# EAGLE board Led_Switch (EAGLE 4.16)
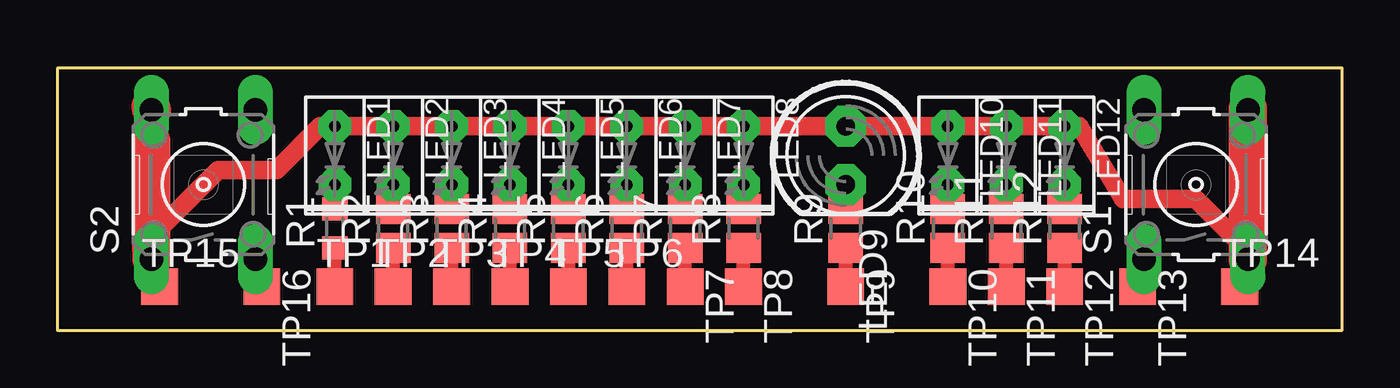
[diagram p0: board, top side]

Size 55.88 x 11.43 mm. Coordinates in mm from the lower left corner, seen from the top.
Outline: 0,0 55.88,0 55.88,11.43 0,11.43 0,0
Copper layers (1*2+15*16): Top 0.035mm / dielectric 0.2mm / Route2 0.035mm / dielectric 0.15mm / Route15 0.035mm / dielectric 0.2mm / Bottom 0.035mm
Design rules "default": minimum track width 10mil, minimum drill 24mil, track to track 8mil, track to pad 8mil, pad to pad 8mil, via to via 8mil, smd to smd 8mil, copper to edge 40mil, drill to drill 8mil, minimum pad ring 10mil, minimum via ring 8mil, stop-mask expansion 4mil, vias tented up to drill 0mil, thermal gap 10mil

## Footprints (pad centres in the part's own frame; a part is rotated, then mirrored left to right if it is on the bottom)
LED2X5 = drill 0.5 pad 1.422 octagon: A -1.27,0; K 1.27,0
LED5MM = drill 0.813 pad 1.778 octagon: A -1.27,0; K 1.27,0
R0603 = smd 1 x 1.1: 1 -0.85,0; 2 0.85,0
R0805 = smd 1.3 x 1.5: 1 -0.85,0; 2 0.85,0
B3F-10XX = drill 1.016 long: 1 -3.251,2.261; 2 3.251,2.261; 3 -3.251,-2.261; 4 3.251,-2.261
TP16SQ = smd 1.6 x 1.6: TP 0,0

## Placement (x,y rotation side)
LED1  grn  [LED2X5]  12.06,7.62 270 top
LED2  grn  [LED2X5]  14.6,7.62 270 top
LED3  grn  [LED2X5]  17.14,7.62 270 top
LED4  grn  [LED2X5]  19.69,7.62 270 top
LED5  grn  [LED2X5]  22.23,7.62 270 top
LED6  yel  [LED2X5]  24.77,7.62 270 top
LED7  yel  [LED2X5]  27.3,7.62 270 top
LED8  yel  [LED2X5]  29.85,7.62 270 top
LED9  blue  [LED5MM]  34.29,7.62 270 top
LED10  red  [LED2X5]  38.73,7.62 270 top
LED11  red  [LED2X5]  41.27,7.62 270 top
LED12  red  [LED2X5]  43.81,7.62 270 top
R1  139  [R0603]  12.06,4.45 90 top
R2  139  [R0805]  14.6,4.45 90 top
R3  139  [R0805]  17.14,4.45 90 top
R4  139  [R0805]  19.69,4.45 90 top
R5  139  [R0805]  22.23,4.45 90 top
R6  139  [R0805]  24.77,4.45 90 top
R7  139  [R0805]  27.3,4.45 90 top
R8  139  [R0805]  29.85,4.45 90 top
R9  [R0805]  34.29,4.45 90 top
R10  144  [R0805]  38.73,4.45 90 top
R11  144  [R0805]  41.27,4.45 90 top
R12  144  [R0805]  43.81,4.45 90 top
S1  [B3F-10XX]  49.53,6.35 90 top
S2  [B3F-10XX]  6.35,6.35 90 top
TP1  TPTP16SQ  [TP16SQ]  12.06,1.9 0 top
TP2  TPTP16SQ  [TP16SQ]  14.6,1.9 0 top
TP3  TPTP16SQ  [TP16SQ]  17.14,1.9 0 top
TP4  TPTP16SQ  [TP16SQ]  19.69,1.9 0 top
TP5  TPTP16SQ  [TP16SQ]  22.23,1.9 0 top
TP6  TPTP16SQ  [TP16SQ]  24.77,1.9 0 top
TP7  TPTP16SQ  [TP16SQ]  27.3,1.9 270 top
TP8  TPTP16SQ  [TP16SQ]  29.85,1.9 270 top
TP9  TPTP16SQ  [TP16SQ]  34.29,1.9 270 top
TP10  TPTP16SQ  [TP16SQ]  38.73,1.9 270 top
TP11  TPTP16SQ  [TP16SQ]  41.27,1.9 270 top
TP12  TPTP16SQ  [TP16SQ]  43.81,1.9 270 top
TP13  TPTP16SQ  [TP16SQ]  46.99,1.9 270 top
TP14  TPTP16SQ  [TP16SQ]  51.44,1.9 0 top
TP15  TPTP16SQ  [TP16SQ]  4.45,1.9 0 top
TP16  TPTP16SQ  [TP16SQ]  8.89,1.9 270 top

## Library data of the parts
LED1-LED12 = led
R1-R12 = rcl
S1 S2 = switch-omron
TP1-TP16 = Stofer

## Nets
+5V: LED1.A LED2.A LED3.A LED4.A LED5.A LED6.A LED7.A LED8.A LED9.A LED10.A LED11.A LED12.A S1.3 S1.4 S2.1 S2.2 TP14.TP TP15.TP
N$1: LED1.K R1.2
N$3: LED2.K R2.2
N$4: LED3.K R3.2
N$5: LED4.K R4.2
N$6: LED5.K R5.2
N$7: S2.3 TP16.TP
N$8: S1.1 TP13.TP
N$9: LED6.K R6.2
N$10: LED7.K R7.2
N$11: LED8.K R8.2
N$12: LED9.K R9.2
N$13: LED10.K R10.2
N$14: LED11.K R11.2
N$15: LED12.K R12.2
N$17: R1.1 TP1.TP
N$18: R2.1 TP2.TP
N$19: R3.1 TP3.TP
N$20: R4.1 TP4.TP
N$21: R5.1 TP5.TP
N$22: R6.1 TP6.TP
N$23: R7.1 TP7.TP
N$24: R8.1 TP8.TP
N$25: R9.1 TP9.TP
N$26: R10.1 TP10.TP
N$27: R11.1 TP11.TP
N$28: R12.1 TP12.TP

## Tracks (layer width: path | path; a pad name or v marks a point on that pad's centre or on a via)
+5V
  Top 0.406: S2.2 4.1,9.61 | 3.81,3.1 3.81,3.18 | S2.1 3.81,3.1 | TP15.TP 3.81,1.9 3.81,3.1
  Top 0.813: 4.45,8.26 4.44,8.25 4.07,8.25 4.07,3.43 3.81,3.18 3.81,8.89 4.45,9.53 4.37,9.6 S2.2 | S1.3 51.99,3.1 52.07,3.18 51.44,3.81 | 51.44,3.81 49.53,5.71 46.36,5.71 44.45,8.89 LED12.A LED11.A LED10.A LED9.A LED8.A LED7.A LED6.A LED5.A LED4.A LED3.A LED2.A LED1.A 11.43,8.89 9.53,6.99 6.99,6.99 3.81,3.81 | 3.81,3.81 | 4.09,3.81 3.81,3.81 | 51.44,3.81 TP14.TP
  Top 1.422: S1.4 51.77,9.52
  Top 1.676: S2.2 4.06,9.74 | S2.1 4.09,3.81 4.07,8.25 | S1.4 51.79,9.66 S1.3
N$1
  Top 0.61: R1.2 LED1.K
N$3
  Top 0.61: R2.2 LED2.K
N$4
  Top 0.61: R3.2 LED3.K
N$5
  Top 0.61: R4.2 LED4.K
N$6
  Top 0.61: R5.2 LED5.K
N$7
  Top 0.813: 8.89,3.18 S2.3 8.65,3.11 TP16.TP
N$8
  Top 0.813: S1.1 47.31,3.25 TP13.TP
N$9
  Top 0.61: R6.2 LED6.K
N$10
  Top 0.61: R7.2 LED7.K
N$11
  Top 0.61: R8.2 LED8.K
N$12
  Top 0.61: LED9.K 34.26,6.32 34.29,6.3 R9.2
N$13
  Top 0.61: R10.2 LED10.K
N$14
  Top 0.61: R11.2 LED11.K
N$15
  Top 0.61: R12.2 LED12.K
N$17
  Top 0.61: TP1.TP R1.1
N$18
  Top 0.61: TP2.TP R2.1
N$19
  Top 0.61: TP3.TP R3.1
N$20
  Top 0.61: TP4.TP R4.1
N$21
  Top 0.61: TP5.TP R5.1
N$22
  Top 0.61: TP6.TP R6.1
N$23
  Top 0.61: TP7.TP R7.1
N$24
  Top 0.61: TP8.TP R8.1
N$25
  Top 0.61: TP9.TP R9.1
N$26
  Top 0.61: TP10.TP R10.1
N$27
  Top 0.61: TP11.TP R11.1
N$28
  Top 0.61: TP12.TP R12.1

## Text on the board
Document: Print top and bottom layers on "top" of PCB. LED's and Switches are mounted on the bottom, res on top | Pirint Non Mirrored